# EAGLE board PacBot Official Schematic 2018-2019 (EAGLE 9.2.0)
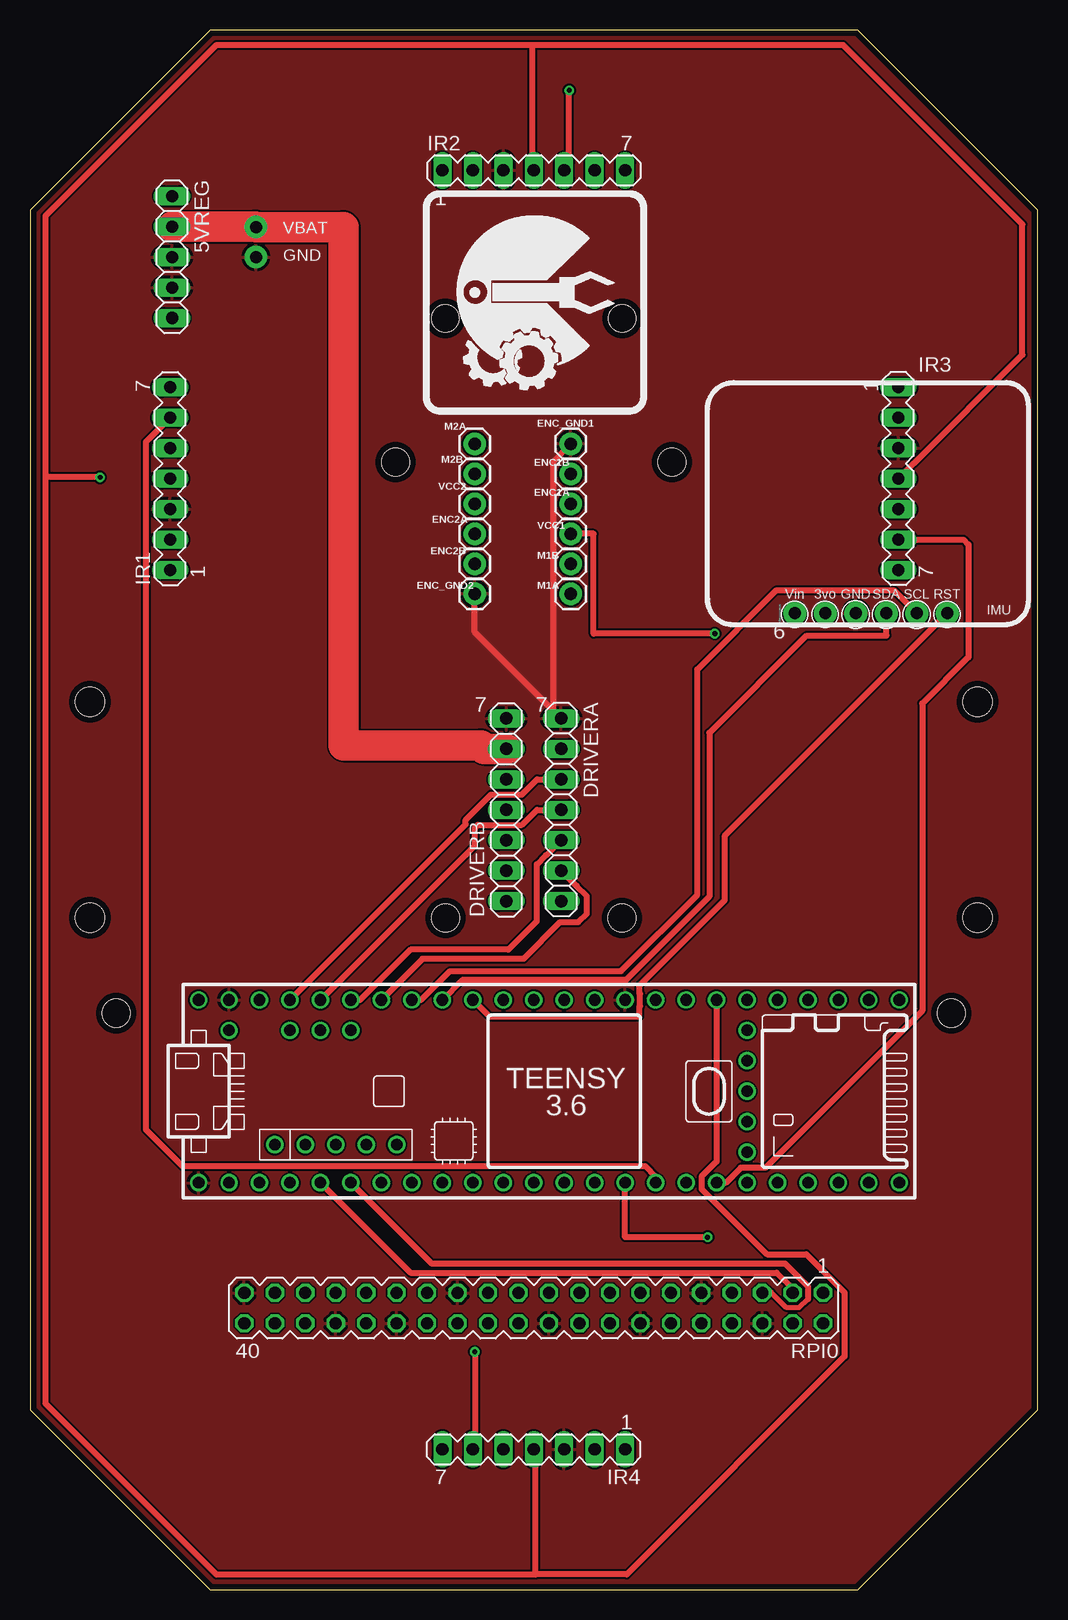
[diagram p0: board, top side]
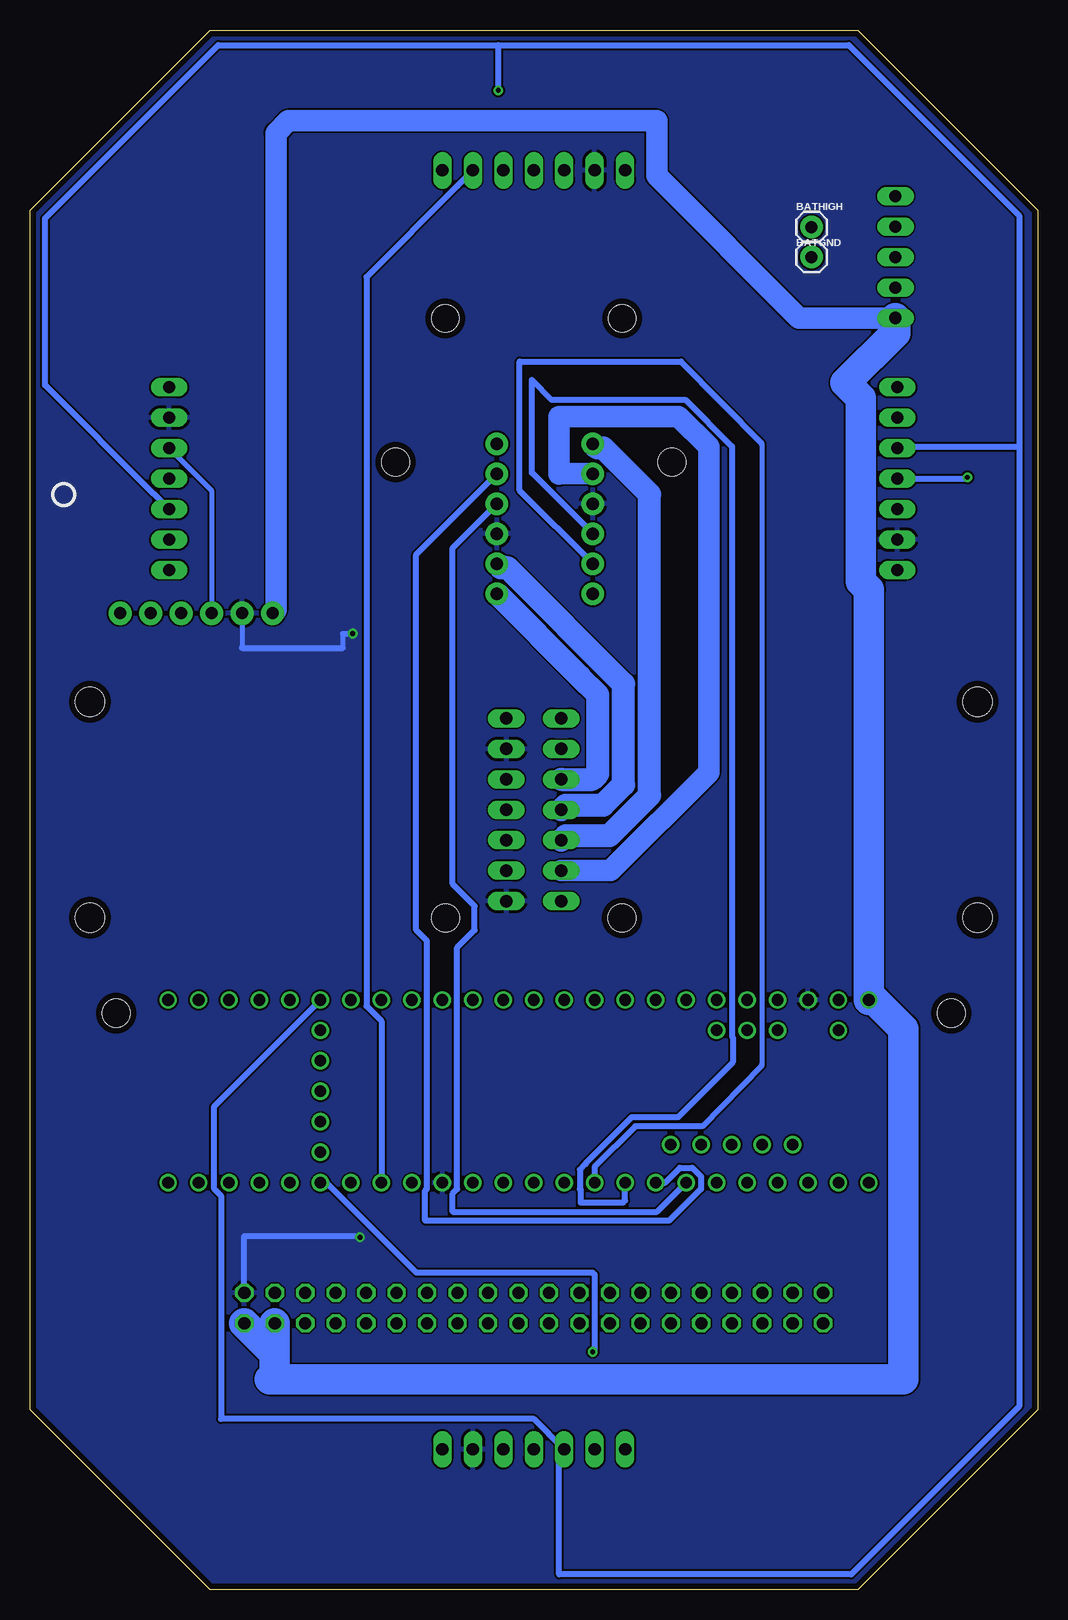
[diagram p1: board, bottom side, seen from below]

Size 84 x 130 mm. Coordinates in mm from the lower left corner, seen from the top.
Outline: 15,0 69,0 84,15 84,115 69,130 15,130 0,115 0,15 15,0
Copper layers (1*16): Top 0.0178mm / dielectric 59mil / Bottom 0.0178mm
Design rules "SSC-EAGLE-2Lyr_v1.0.0.3": minimum track width 6mil, minimum drill 14mil, track to track 6mil, track to pad 6mil, pad to pad 6mil, via to via 6mil, smd to smd 6mil, copper to edge 20mil, drill to drill 16mil, minimum pad ring 8mil, minimum via ring 8mil, stop-mask expansion 3mil, vias tented up to drill 0mil, thermal gap 10mil
Holes 2.33 mm at 76.81,48.05 49.37,55.97 34.63,55.97 7.19,48.05 30.48,93.98 53.52,93.98
Holes 2.44 mm at 79,56 79,74 5,56 5,74
Holes 2.29 mm at 49.37,105.97 34.63,105.97

## Footprints (pad centres in the part's own frame; a part is rotated, then mirrored left to right if it is on the bottom)
1X05 = drill 1.016 long: 1 -5.08,0; 2 -2.54,0; 3 0,0; 4 2.54,0; 5 5.08,0
1X01 = drill 1.016 pad 1.88: 1 0,0
1X07 = drill 1.016 long: 1 -7.62,0; 2 -5.08,0; 3 -2.54,0; 4 0,0; 5 2.54,0; 6 5.08,0; 7 7.62,0
1X06_ROUND_76 = drill 1 pad 1.93: 1 -6.35,0; 2 -3.81,0; 3 -1.27,0; 4 1.27,0; 5 3.81,0; 6 6.35,0
MA07-1 = drill 1.016 long: 1 -7.62,0; 2 -5.08,0; 3 -2.54,0; 4 0,0; 5 2.54,0; 6 5.08,0; 7 7.62,0
MA20-2 = drill 1.016 octagon: 1 -24.13,-1.27; 2 -24.13,1.27; 3 -21.59,-1.27; 4 -21.59,1.27; 5 -19.05,-1.27; 6 -19.05,1.27; 7 -16.51,-1.27; 8 -16.51,1.27; 9 -13.97,-1.27; 10 -13.97,1.27; 11 -11.43,-1.27; 12 -11.43,1.27; 13 -8.89,-1.27; 14 -8.89,1.27; 15 -6.35,-1.27; 16 -6.35,1.27; 17 -3.81,-1.27; 18 -3.81,1.27; 19 -1.27,-1.27; 20 -1.27,1.27; 21 1.27,-1.27; 22 1.27,1.27; 23 3.81,-1.27; 24 3.81,1.27; 25 6.35,-1.27; 26 6.35,1.27; 27 8.89,-1.27; 28 8.89,1.27; 29 11.43,-1.27; 30 11.43,1.27; 31 13.97,-1.27; 32 13.97,1.27; 33 16.51,-1.27; 34 16.51,1.27; 35 19.05,-1.27; 36 19.05,1.27; 37 21.59,-1.27; 38 21.59,1.27; 39 24.13,-1.27; 40 24.13,1.27
TEENSY_3.5/3.6 = drill 0.965: 0/RX -25.4,-7.62; 1/TX -22.86,-7.62; 2 -20.32,-7.62; 3/CANTX -17.78,-7.62; 3V3 7.62,-7.62; 3V3_2 17.78,-2.54; 3V3_LO -22.86,7.62; 4/CANRX -15.24,-7.62; 5 -12.7,-7.62; 6 -10.16,-7.62; 7 -7.62,-7.62; 8 -5.08,-7.62; 9/CS -2.54,-7.62; 10/CS 0,-7.62; 11/MOSI 2.54,-7.62; 12/MISO 5.08,-7.62; 13/SCK 5.08,7.62; 14/A0 2.54,7.62; 15/A1 0,7.62; 16/A2 -2.54,7.62; 17/A3 -5.08,7.62; 18/A4/SDA -7.62,7.62; 19/A5/SCL -10.16,7.62; 20/A6 -12.7,7.62; 21/A7 -15.24,7.62; 21/DAC0 12.7,7.62; 22/A8 -17.78,7.62; 23/A9 -20.32,7.62; 24 10.16,-7.62; 25 12.7,-7.62; 26 15.24,-7.62; 27 17.78,-7.62; 28 20.32,-7.62; 29 22.86,-7.62; 30 25.4,-7.62; 31/A12 27.94,-7.62; 32/A13 30.48,-7.62; 33/A14 30.48,7.62; 34/A15 27.94,7.62; 35/A16 25.4,7.62; 36/A17 22.86,7.62; 37/A18 20.32,7.62; 38/A19 17.78,7.62; 39/A20 15.24,7.62; A10 -17.78,5.08; A11 -15.24,5.08; A22/DAC1 10.16,7.62; AGND -25.4,7.62; AREF -20.32,5.08; GND -27.94,-7.62; GND2 7.62,7.62; GND3 17.78,0; PROG 17.78,2.54; RESET 17.78,5.08; U5V -21.59,-4.445; UD+ -16.51,-4.445; UD- -19.05,-4.445; UGND1 -13.97,-4.445; UGND2 -11.43,-4.445; VBAT 17.78,-5.08; VIN -27.94,7.62; VUSB -25.4,5.08

## Placement (x,y rotation side)
5VREG  [1X05]  11.84,111.07 270 top
BATGND  [1X01]  18.84,111.07 0 bottom
BATHIGH  [1X01]  18.84,113.57 0 bottom
DRIVERA  [1X07]  44.29,65 270 top
DRIVERB  [1X07]  39.71,65 90 top
ENC1A  [1X01]  45.08,90.51 0 top
ENC1B  [1X01]  45.08,93.01 0 top
ENC2A  [1X01]  37.08,88.01 0 top
ENC2B  [1X01]  37.08,85.51 90 top
ENC_GND1  [1X01]  45.08,95.51 0 top
ENC_GND2  [1X01]  37.08,83.01 0 top
IMU  [1X06_ROUND_76]  70.13,81.38 0 top
IR1  [MA07-1]  11.68,92.6 90 top
IR2  [MA07-1]  42,118.3 0 top
IR3  [MA07-1]  72.39,92.6 270 top
IR4  [MA07-1]  42,11.68 180 top
M1A  [1X01]  45.08,83.01 0 top
M1B  [1X01]  45.08,85.51 0 top
M2A  [1X01]  37.08,95.51 0 top
M2B  [1X01]  37.08,93.01 0 top
RPI0  [MA20-2]  42,23.46 180 top
U$1  TEENSY_3.5/3.6  [TEENSY_3.5/3.6]  42,41.53 0 top
U$65  [PCBFEAT-REV-040]  81.18,91.26 0 bottom
VCC1  [1X01]  45.08,88.01 0 top
VCC2  [1X01]  37.08,90.51 0 top

## Library data of the parts
5VREG DRIVERA DRIVERB = pinhead
BATGND BATHIGH ENC1A ENC1B ENC2A ENC2B ENC_GND1 ENC_GND2 M1A M1B M2A M2B VCC1 VCC2 = SparkFun-Connectors
IMU U$65 = microbuilder
IR1-IR4 RPI0 = con-lstb; OC_FARNELL: unknown; OC_NEWARK: unknown
U$1 = Teensy356

## Nets
3.3V: DRIVERA.2 DRIVERA.7 IMU.2 IR1.2 IR2.2 IR3.2 IR4.2 RPI0.1 U$1.3V3 U$1.3V3_LO VCC1.1 VCC2.1
5.0V: 5VREG.5 IMU.1 RPI0.2 RPI0.4 U$1.VIN
AENBL: DRIVERA.5 U$1.21/A7
APHASE: DRIVERA.6 U$1.20/A6
BENBL: DRIVERA.3 U$1.23/A9
BPHASE: DRIVERA.4 U$1.22/A8
GND: 5VREG.3 5VREG.4 BATGND.1 DRIVERA.1 DRIVERB.7 ENC_GND1.1 ENC_GND2.1 IMU.3 IR1.3 IR2.3 IR3.3 IR4.3 RPI0.6 RPI0.9 RPI0.14 RPI0.20 RPI0.25 RPI0.30 RPI0.34 RPI0.39 U$1.AGND U$1.GND U$1.GND2
N$1: ENC1A.1 U$1.5
N$2: IR2.6 U$1.25
N$3: RPI0.3 U$1.3/CANTX
N$4: IR3.6 U$1.26
N$5: ENC1B.1 U$1.6
N$6: RPI0.5 U$1.4/CANRX
N$7: IR4.6 U$1.27
N$8: DRIVERB.5 M1A.1
N$9: DRIVERB.4 M1B.1
N$10: DRIVERB.3 M2A.1
N$11: DRIVERB.2 M2B.1
N$12: ENC2A.1 U$1.7
N$13: ENC2B.1 U$1.8
N$23: IR1.6 U$1.24
RST_5V: IMU.6 U$1.17/A3
SCL1: IR1.5 IR2.5 IR3.5 IR4.5 U$1.38/A19
SCL_5V: IMU.5 U$1.19/A5/SCL
SDA1: IR1.4 IR2.4 IR3.4 IR4.4 U$1.39/A20
SDA_5V: IMU.4 U$1.18/A4/SDA
VBAT: 5VREG.2 BATHIGH.1 DRIVERB.6

## Tracks (layer width: path | path; a pad name or v marks a point on that pad's centre or on a via)
3.3V  (via drill 0.4)
  Top 0.508: v56.49,29.36 49.62,29.36 U$1.3V3 | v57.09,79.68 46.99,79.68 46.99,88.01 VCC1.1
  Bottom 0.406: 56.39,29.46 56.39,29.36 v56.49,29.36 | IMU.2 66.32,78.49 | 57.91,78.49 57.91,79.68
  Bottom 0.508: RPI0.1 66.13,29.46 56.39,29.46 | 66.32,78.49 57.91,78.49 | 57.91,79.68 v57.09,79.68
  pour Bottom: -8.89,119.63 -8.89,-10.67 96.01,-10.67 96.01,137.92 -7.62,137.92 -8.89,137.92
5.0V
  Bottom 1.778: 5VREG.5 19.89,105.99 31.75,117.86 31.75,122.43 62.48,122.43 63.5,121.41 63.5,81.66 IMU.1
  Bottom 2.54: 5VREG.5 11.84,104.74 16,100.58 14.73,99.31 14.73,84.03 14.06,83.36 U$1.VIN 13.59,49.15 11.18,46.74 11.18,17.53 64.01,17.53 63.59,17.94 63.59,19.65 | RPI0.4 63.59,19.65 | RPI0.2 63.59,19.65
AENBL
  Top 0.508: U$1.21/A7 27.54,49.15 31.73,53.34 39.88,53.34 42.25,55.72 42.25,60.45 43,61.19 43.02,61.19 DRIVERA.5
APHASE
  Top 0.508: U$1.20/A6 32.73,52.58 41.15,52.58 44.2,55.63 45.72,55.63 46.42,56.33 46.42,57.8 45.57,58.65 45.56,58.65 DRIVERA.6
BENBL
  Top 0.508: U$1.23/A9 36.32,63.79 36.32,64.17 38.43,66.27 41,66.27 42.27,67.54 DRIVERA.3
BPHASE
  Top 0.508: U$1.22/A8 37.08,62.01 37.08,63.5 37.31,63.73 41,63.73 42.27,65 DRIVERA.4
GND
  Top 0.406: IMU.3 68.86,81.28
  Top 0.508: ENC_GND2.1 37.08,79.83 DRIVERA.1 43.63,73.27 43.63,94.06 ENC_GND1.1
  Bottom 0.406: IR3.3 68.86,91.61 IMU.3
  pour Top: -6.1,132.59 88.9,132.59 88.9,-6.35 -6.1,-6.35
N$1
  Bottom 0.508: U$1.5 31.71,31.5 48.77,31.5 48.77,33 48.38,33.39 48.38,53.52 46.93,54.96 46.93,56.98 48.77,58.82 48.77,86.82 ENC1A.1
N$2
  Bottom 0.508: IR2.6 48.35,117.03 48.35,117.01 55.95,109.41 55.95,48.64 54.7,47.39 U$1.25
N$3
  Top 0.508: U$1.3/CANTX 31.71,26.42 62.23,26.42 63.59,25.06 RPI0.3
N$4
  Top 0.508: IR3.6 77.83,87.52 78.23,87.12 78.23,77.72 74.38,73.87 74.38,48.22 61.32,35.15 59.26,35.15 58.02,33.91 U$1.26
N$5
  Bottom 0.508: U$1.6 31.06,33.91 29.82,35.15 28.78,35.15 28.05,34.42 28.05,33.39 30.71,30.73 51.05,30.73 51.05,33.26 50.91,33.39 50.91,54.08 51.8,54.96 51.8,86.29 ENC1B.1
N$6
  Top 0.432: 64.86,24.21 64.12,23.49 63.06,23.49 61.79,24.73
  Top 0.508: U$1.4/CANRX 33.49,27.18 62.94,27.18 64.86,25.26 64.86,24.21 | 61.79,24.73 RPI0.5
N$7  (via drill 0.4)
  Top 0.508: v37.08,19.81 37.08,11.85 IR4.6
  Bottom 0.508: U$1.27 59.27,33.91 51.78,26.42 37.08,26.42 36.92,26.25 36.92,19.98 v37.08,19.81
N$8
  Bottom 1.905: DRIVERB.5 37.11,67.54 36.67,67.98 36.67,74.59 38.19,76.11 M1A.1
N$9
  Bottom 1.905: M1B.1 44.74,85.17 44.19,85.17 34.51,75.49 34.51,67.09 36.21,65.38 39.33,65.38 DRIVERB.4
N$10
  Bottom 1.905: DRIVERB.3 39.33,62.84 35.7,62.84 32.35,66.19 32.35,91.31 36.19,95.15 36.73,95.15 M2A.1
N$11
  Bottom 1.778: M2B.1 39.83,93.01 39.88,92.96 39.88,97.79 29.95,97.79 27.41,95.25 27.41,68.09 35.58,59.92 DRIVERB.2
N$12
  Bottom 0.508: ENC2A.1 42.16,93.09 42.16,100.84 40.51,99.19 29.37,99.19 25.46,95.28 25.46,46.09 25.4,46.03 25.4,43.94 29.97,39.37 33.84,39.37 37.68,35.53 37.68,35.47 38.16,34.99 38.16,33.39 38.1,33.33 38.1,32.26 34.54,32.26 34.38,32.42 U$1.7
N$13
  Bottom 0.432: 22.99,95.5 22.99,43.69
  Bottom 0.508: ENC2B.1 43.18,91.61 43.18,102.36 29.72,102.36 22.99,95.5 | 22.99,43.69 27.94,38.61 33.53,38.61 36.92,35.22 U$1.8
N$23
  Top 0.508: IR1.6 10.41,96.41 10.4,96.41 9.65,95.67 9.65,38.35 12.7,35.31 51.31,35.31 52.16,34.45 U$1.24
RST_5V
  Top 0.508: IMU.6 57.9,62.8 57.9,57.44 50.8,50.34 50.8,49.73 50.87,49.66 50.87,48.63 50.8,48.57 50.8,47.75 38.32,47.75 U$1.17/A3
SCL1  (via drill 0.4)
  Top 0.508: IR2.5 44.96,118.72 v44.96,124.97
  Bottom 0.508: IR3.5 73.66,91.33 73.68,91.33 82.73,100.38 82.73,114.3 68.3,128.73 44.96,128.73 | 44.96,128.73 15.75,128.73 1.54,114.52 1.54,95.25 | 1.54,95.25 1.54,15.26 15.53,1.27 39.88,1.27 39.88,11.27 IR4.5 40.73,12.95 40.73,12.97 41.98,14.22 68.07,14.22 68.07,32.82 68.64,33.39 68.64,40.28 U$1.38/A19 | 1.54,95.25 11.57,95.25 IR1.5 | v44.96,124.97 44.96,128.73
SCL_5V
  Top 0.508: U$1.19/A5/SCL 32.62,49.15 35.03,51.56 49.28,51.56 55.63,57.91 55.63,76.71 62.23,83.31 72.01,83.31 IMU.5
SDA1  (via drill 0.4)
  Top 0.508: IR3.4 73.66,93.87 73.68,93.87 82.73,102.92 82.73,113.79 67.79,128.73 41.91,128.73 | 41.91,128.73 15.53,128.73 1.29,114.49 1.29,92.71 | 1.29,92.71 1.29,15.51 15.53,1.27 42.16,1.27 | 42.16,1.27 42.16,11.52 IR4.4 | v5.84,92.71 1.29,92.71 | IR2.4 41.91,118.39 41.91,128.73 | U$1.39/A20 57.24,35.67 55.99,34.42 55.99,33.39 61.45,27.94 64.72,27.94 67.91,24.75 67.91,19.42 49.76,1.27 42.16,1.27
  Bottom 0.508: IR1.4 5.95,92.6 v5.84,92.71
SDA_5V
  Top 0.508: U$1.18/A4/SDA 36.03,50.8 49.67,50.8 56.63,57.76 56.63,71.4 64.73,79.5 71.37,79.5 71.4,79.53 IMU.4
VBAT
  Top 2.54: 5VREG.2 18.8,113.61 BATHIGH.1 26.13,113.57 26.16,113.54 26.16,70.36 37.59,70.36 37.87,70.08 DRIVERB.6

## Text on the board
tPlace: C:/Users/charl/Downloads/pacbot2v2blk.bmp | Vin | 3vo | GND | SDA | SCL | RST
tNames: VBAT | GND | 6 | 7 | 7